# EAGLE board DA-2000 (EAGLE 9.6.2)
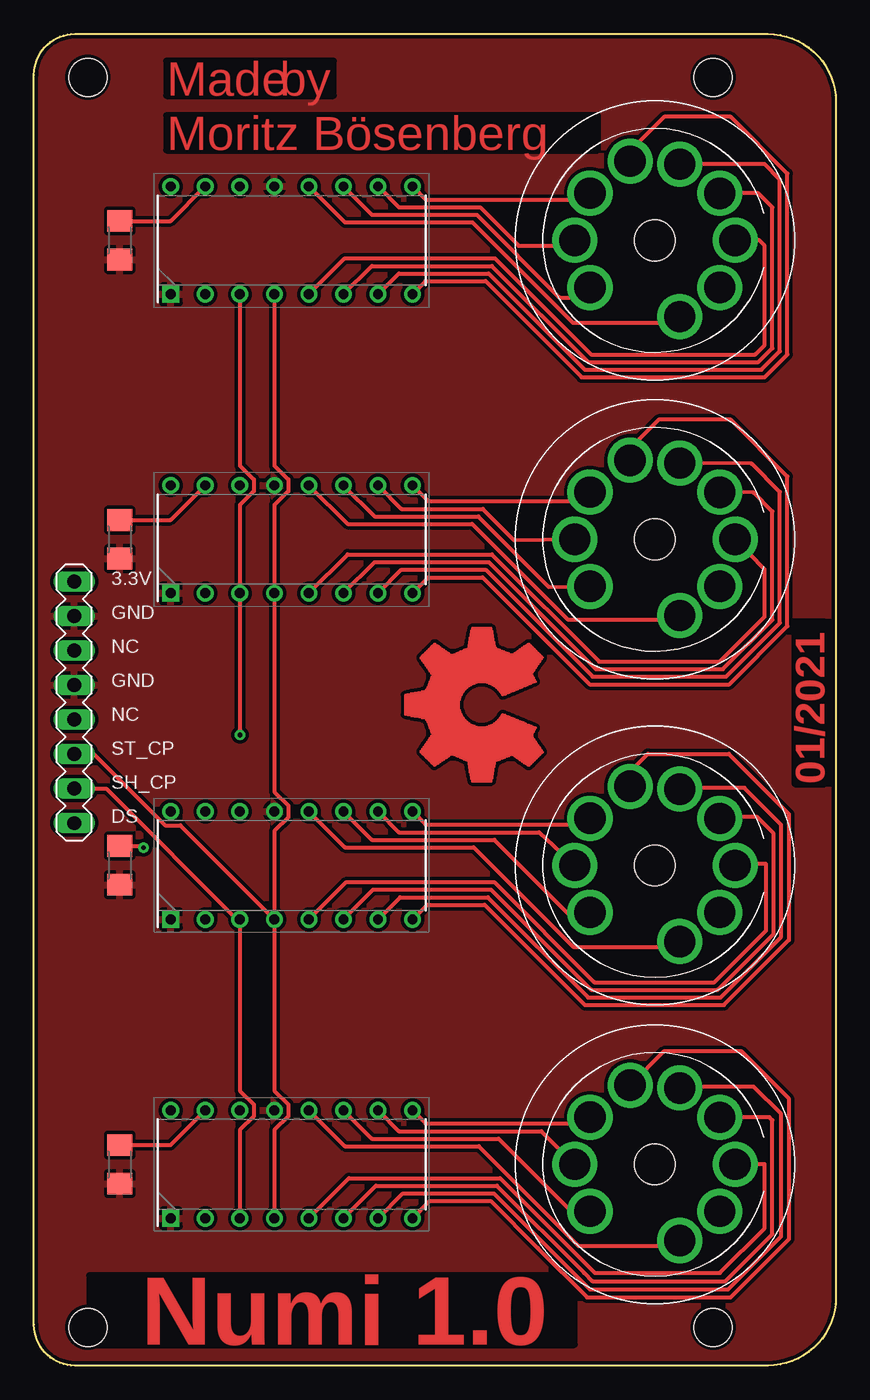
[diagram p0: board, top side]
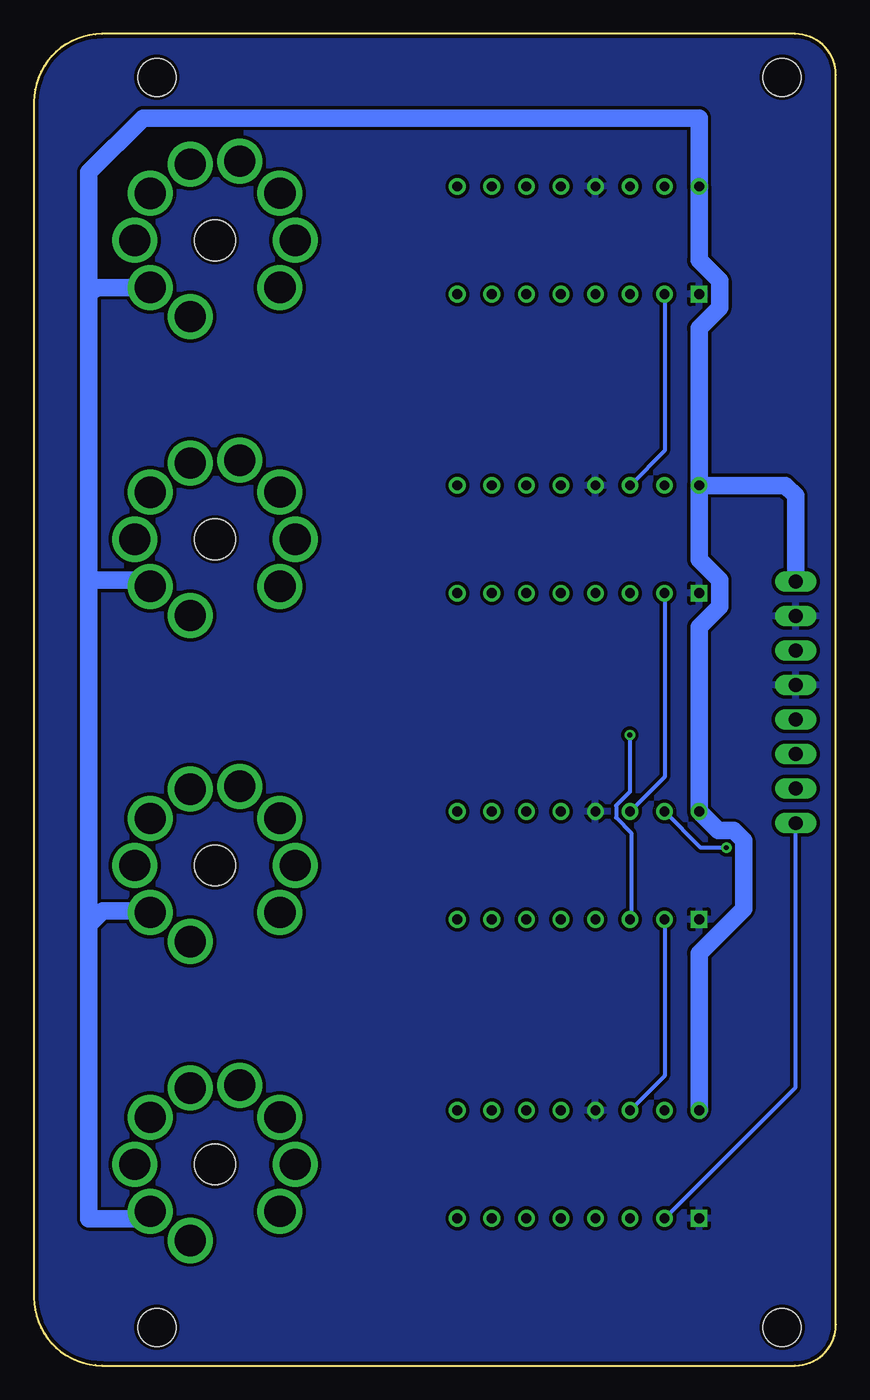
[diagram p1: board, bottom side, seen from below]

Size 59 x 98 mm. Coordinates in mm from the lower left corner, seen from the top.
Outline: 3,98 54,98 arc-90 59,93 59,5 arc-90 54,0 3,0 arc-90 0,3 0,95 arc-90 3,98
Copper layers (1*16): Top 0.035mm / dielectric 1.5mm / Bottom 0.035mm
Design rules "default *": minimum track width 6mil, minimum drill 0.35mm, track to track 10mil, track to pad 10mil, pad to pad 10mil, via to via 10mil, smd to smd 6mil, copper to edge 10mil, drill to drill 6mil, minimum pad ring 10mil, minimum via ring 8mil, stop-mask expansion 4mil, vias tented up to drill 0mil, thermal gap 10mil
Net classes: 0 default: width 0.2 mm, drill 0.3 mm, clearance 0.2 mm; 1 other: width 0.2 mm, drill 0.2 mm, clearance 0.2 mm
Holes 2.8 mm at 3.96,2.81 49.96,2.81 3.96,94.81 49.96,94.81

## Footprints (pad centres in the part's own frame; a part is rotated, then mirrored left to right if it is on the bottom)
DIP794W53P254L1930H508Q16N = drill 0.73 pad 1.13 square: 1 -3.97,8.89 | drill 0.73 pad 1.13: 2 -3.97,6.35; 3 -3.97,3.81; 4 -3.97,1.27; 5 -3.97,-1.27; 6 -3.97,-3.81; 7 -3.97,-6.35; 8 -3.97,-8.89; 9 3.97,-8.89; 10 3.97,-6.35; 11 3.97,-3.81; 12 3.97,-1.27; 13 3.97,1.27; 14 3.97,3.81; 15 3.97,6.35; 16 3.97,8.89
R1206 = smd 1.6 x 1.803: 1 -1.422,0; 2 1.422,0
MA08-1 = drill 1.016 long: 1 -8.89,0; 2 -6.35,0; 3 -3.81,0; 4 -1.27,0; 5 1.27,0; 6 3.81,0; 7 6.35,0; 8 8.89,0
DA-2000 = drill 2.3 pad 3.1: 1 -5.611,-1.823; 2 -3.468,-4.773; 3 0,-5.9; 4 3.46,-4.773; 5 5.611,-1.823; 6 5.819,1.823; 7 3.468,4.773; 8 0,5.9; 9 -3.468,4.773 | hole 3: 0,0

## Placement (x,y rotation side)
IC1  TLC5916IN  [DIP794W53P254L1930H508Q16N]  18.96,14.81 90 top
IC2  TLC5916IN  [DIP794W53P254L1930H508Q16N]  18.96,36.81 90 top
IC3  TLC5916IN  [DIP794W53P254L1930H508Q16N]  18.96,60.81 90 top
IC4  TLC5916IN  [DIP794W53P254L1930H508Q16N]  18.96,82.81 90 top
R1  1K  [R1206]  6.31,14.81 90 top
R2  1K  [R1206]  6.31,36.81 90 top
R3  1K  [R1206]  6.31,60.81 90 top
R4  1K  [R1206]  6.31,82.81 90 top
SV2  [MA08-1]  2.96,48.81 90 top
U$1  [DA-2000]  45.68,14.81 90 top
U$2  [DA-2000]  45.68,36.81 90 top
U$3  [DA-2000]  45.68,60.81 90 top
U$4  [DA-2000]  45.68,82.81 90 top

## Library data of the parts
IC1-IC4 = NixieTube; DESCRIPTION: 8-CHANNEL CONSTANT-CURRENT LED SINK DRIVERS; HEIGHT: 5.08mm; MANUFACTURER_NAME: Texas Instruments; MANUFACTURER_PART_NUMBER: TLC5916IN; MOUSER_PART_NUMBER: 595-TLC5916IN; MOUSER_PRICE-STOCK: https://www.mouser.com/Search/Refine.aspx?Keyword=595-TLC5916IN
R1-R4 = rcl; SPICEPREFIX: R
SV2 = CommonParts; OC_FARNELL: unknown; OC_NEWARK: unknown
U$1-U$4 = NixieTube

## Nets
3.3V: IC1.16 IC2.16 IC3.16 IC4.16 SV2.8 U$1.2 U$2.2 U$3.2 U$4.2
DEC_1: IC1.12 U$1.1
DEC_2: IC2.12 U$2.1
DEC_3: IC3.12 U$3.1
DEC_4: IC4.12 U$4.1
DS: IC1.2 SV2.1
GND: IC1.1 IC1.13 IC2.1 IC2.13 IC3.1 IC3.13 IC4.1 IC4.13 R1.1 R2.1 R3.1 R4.1 SV2.5 SV2.7
N$1: IC3.8 U$3.6
N$2: IC3.9 U$3.7
N$3: IC1.5 U$1.3
N$4: IC1.6 U$1.4
N$5: IC1.7 U$1.5
N$6: IC1.8 U$1.6
N$7: IC4.8 U$4.6
N$8: IC1.9 U$1.7
N$9: IC4.9 U$4.7
N$10: IC1.10 U$1.8
N$11: IC1.11 U$1.9
N$12: IC2.5 U$2.3
N$14: IC2.6 U$2.4
N$33: IC2.7 U$2.5
N$34: IC2.8 U$2.6
N$37: IC2.9 U$2.7
N$38: IC2.10 U$2.8
N$39: IC2.11 U$2.9
N$40: IC3.5 U$3.3
N$41: IC3.6 U$3.4
N$42: IC3.7 U$3.5
N$43: IC4.5 U$4.3
N$44: IC4.6 U$4.4
N$45: IC3.10 U$3.8
N$46: IC3.11 U$3.9
N$47: IC4.7 U$4.5
N$49: IC1.14 IC2.2
N$50: IC4.10 U$4.8
N$51: IC4.11 U$4.9
N$52: IC2.14 IC3.2
N$53: IC3.14 IC4.2
NC: SV2.6
NC2: SV2.4
R-EXT1: IC1.15 R1.2
R-EXT2: IC2.15 R2.2
R-EXT3: IC3.15 R3.2
R-EXT4: IC4.15 R4.2
SH_CP: IC1.3 IC2.3 IC3.3 IC4.3 SV2.2
ST_CP: IC1.4 IC2.4 IC3.4 IC4.4 SV2.3

## Tracks (layer width: path | path; a pad name or v marks a point on that pad's centre or on a via)
3.3V
  Bottom 1.27: IC3.16 10.07,59.34 8.56,57.83 8.56,55.85 10.07,54.34 IC2.16 8.67,39.38 7.54,39.38 6.79,38.64 6.79,33.62 10.07,30.34 IC1.16 | IC3.16 10.07,76.34 8.56,77.85 8.56,79.83 10.07,81.34 IC4.16 10.07,91.81 50.96,91.81 54.96,87.81 54.96,78.81 | SV2.8 2.96,64.01 3.73,64.78 IC3.16 | 54.96,78.81 54.96,57.81 | 54.96,57.81 54.96,32.41 | 54.96,32.41 54.96,10.81 50.98,10.81 U$1.2 | U$2.2 50.55,33.44 53.93,33.44 54.96,32.41 | 54.96,57.81 50.92,57.81 U$3.2 | U$4.2 54.43,79.34 54.96,78.81
DEC_1
  Top 0.305: IC1.12 22.88,16.13 32.74,16.13 40.06,8.81 47.16,8.81 47.5,9.15 U$1.1
DEC_2
  Top 0.305: IC2.12 22.88,38.13 32.34,38.13 39.66,30.81 47.28,30.81 U$2.1
DEC_3
  Top 0.305: IC3.12 23.08,61.93 32.24,61.93 39.26,54.91 47.25,54.91 U$3.1
DEC_4
  Top 0.305: IC4.12 22.88,84.13 32.26,84.13 39.65,76.75 47.05,76.75 U$4.1
DS
  Bottom 0.305: IC1.2 2.96,20.49 SV2.1
GND
  pour Bottom: -0.04,98 59.05,98 59.05,0.01 -0.04,0.01
  pour Top: -0.04,98 59.05,98 59.05,0.01 -0.04,0.01
N$1
  Top 0.305: IC3.8 29.02,58.01 33,58.01 40.88,50.13 51.15,50.13 55.44,54.42 55.44,65.43 51.26,69.61 45.96,69.61 43.86,67.51 U$3.6
N$2
  Top 0.305: IC3.9 29.02,63.61 40.28,63.61 U$3.7
N$3
  Top 0.305: IC1.5 23.18,13.79 34.29,13.79 41.27,6.81 50.46,6.81 53.76,10.11 53.76,14.81 U$1.3
N$4
  Top 0.305: IC1.6 25.16,13.23 34.06,13.23 40.47,6.82 | 40.47,6.82 | 40.47,6.82 41.08,6.21 50.86,6.21 54.32,9.67 54.32,18.05 54.1,18.27 U$1.4
N$5
  Top 0.305: IC1.7 27.14,12.67 33.83,12.67 40.89,5.61 51.06,5.61 54.96,9.51 54.96,18.51 52.95,20.52 47.6,20.52 U$1.5
N$6
  Top 0.305: IC1.8 29.12,12.11 33.6,12.11 37.08,8.63 | 37.08,8.63 | U$1.6 46.34,23.11 52.06,23.11 55.56,19.61 55.56,9.31 51.26,5.01 40.7,5.01 37.08,8.63
N$7
  Top 0.305: IC4.8 28.82,79.81 33.22,79.81 40.3,72.73 53.75,72.73 55.44,74.42 55.44,87.73 51.26,91.91 46.36,91.91 43.86,89.41 U$4.6
N$8
  Top 0.305: IC1.9 28.82,17.81 31.36,17.81 31.56,17.81 40.44,17.81 U$1.7
N$9
  Top 0.305: IC4.9 28.82,85.81 40.44,85.81 U$4.7
N$10
  Top 0.305: IC1.10 26.84,17.25 37.34,17.25 U$1.8
N$11
  Top 0.305: IC1.11 24.86,16.69 34.18,16.69 39.53,11.34 U$1.9
N$12
  Top 0.305: IC2.5 22.98,35.59 33.85,35.59 41.23,28.21 50.06,28.21 53.86,32.01 53.86,36.91 51.68,36.91 U$2.3
N$14
  Top 0.305: IC2.6 24.96,35.03 33.62,35.03 41,27.65 50.29,27.65 54.42,31.78 54.42,39.15 53.2,40.37 50.55,40.37 U$2.4
N$33
  Top 0.305: IC2.7 26.94,34.47 33.39,34.47 40.77,27.09 50.52,27.09 54.98,31.55 54.98,39.79 52.26,42.51 46.96,42.51 47.05,42.42 U$2.5
N$34
  Top 0.305: IC2.8 28.92,33.91 33.16,33.91 40.54,26.53 50.75,26.53 55.54,31.32 55.54,40.59 51.12,45.01 45.16,45.01 43.86,43.71 U$2.6
N$37
  Top 0.305: IC2.9 28.82,39.81 40.61,39.81 U$2.7
N$38
  Top 0.305: IC2.10 26.84,39.25 37.17,39.25 U$2.8
N$39
  Top 0.305: IC2.11 24.86,38.69 33.88,38.69 39.4,33.17 U$2.9
N$40
  Top 0.305: IC3.5 23.08,59.69 33.69,59.69 41.57,51.81 50.46,51.81 53.76,55.11 53.76,58.59 U$3.3
N$41
  Top 0.305: IC3.6 25.06,59.13 33.46,59.13 41.34,51.25 50.69,51.25 54.32,54.88 54.32,62.85 52.94,64.23 U$3.4
N$42
  Top 0.305: IC3.7 27.04,58.57 33.23,58.57 41.11,50.69 50.92,50.69 54.88,54.65 54.88,64.29 52.79,66.38 U$3.5
N$43
  Top 0.305: IC4.5 22.88,81.49 33.92,81.49 40.99,74.41 53.06,74.41 53.76,75.11 53.76,82.41 53.36,82.81 U$4.3
N$44
  Top 0.305: IC4.6 24.86,80.93 33.69,80.93 40.76,73.85 53.29,73.85 54.32,74.88 54.32,85.25 53.3,86.27 U$4.4
N$45
  Top 0.305: IC3.10 27.04,63.05 33.02,63.05 35.3,60.77 U$3.8
N$46
  Top 0.305: IC3.11 25.06,62.49 32.69,62.49 37.88,57.3 U$3.9
N$47
  Top 0.305: IC4.7 26.84,80.37 33.45,80.37 40.53,73.29 53.52,73.29 54.88,74.65 54.88,87.29 53.75,88.42 U$4.5
N$49
  Bottom 0.305: IC2.2 12.61,21.32 IC1.14
N$50
  Top 0.305: IC4.10 26.84,85.25 32.82,85.25 35.66,82.41 39.38,82.41 U$4.8
N$51
  Top 0.305: IC4.11 24.86,84.69 32.58,84.69 38.66,78.61 40.18,78.61 U$4.9
N$52
  Bottom 0.305: IC3.2 12.61,43.32 IC2.14
N$53
  Bottom 0.305: IC4.2 12.61,67.32 IC3.14
R-EXT1
  Top 0.305: R1.2 10.06,16.23 IC1.15
R-EXT2  (via drill 0.35)
  Top 0.305: R2.2 7.94,38.23 v8.06,38.11
  Bottom 0.305: v8.06,38.11 9.94,38.11 IC2.15
R-EXT3
  Top 0.305: R3.2 10.06,62.23 IC3.15
R-EXT4
  Top 0.305: R4.2 10.06,84.23 IC4.15
SH_CP  (via drill 0.35)
  Top 0.305: IC4.3 15.15,66.23 16.18,65.2 16.18,64.36 15.15,63.33 IC3.3 v15.15,46.42 v15.16,46.41 | IC2.3 15.15,32.61 | 15.15,32.61 15.15,20.23 16.18,19.2 16.18,18.36 15.15,17.33 IC1.3 | SV2.2 5.3,42.46 15.15,32.61
  Bottom 0.305: v15.16,46.41 15.16,42.22 16.18,41.21 16.18,40.33 15.06,39.21 15.06,32.93 IC2.3
ST_CP
  Top 0.305: IC2.4 17.69,32.81 17.69,20.23 18.71,19.2 18.71,18.36 17.69,17.33 IC1.4 | IC4.4 17.69,66.23 18.71,65.2 18.71,64.36 17.69,63.33 IC3.4 17.69,42.23 18.71,41.21 18.71,40.36 17.69,39.33 IC2.4 | IC2.4 10.78,39.76 9.65,39.76 4.4,45 SV2.3
(copper drawn outside any net)
  shapes: Top area x369

## Text on the board
Top: Made | by | Moritz Bösenberg | 01/2021 | Numi 1.0
tNames: 3.3V | GND | NC | GND | NC | ST_CP | SH_CP | DS
tStop: Made | by | Moritz Bösenberg | 01/2021 | Numi 1.0
tKeepout: Numi 1.0